# EAGLE board ENC28J60_Wing (EAGLE 6.4)
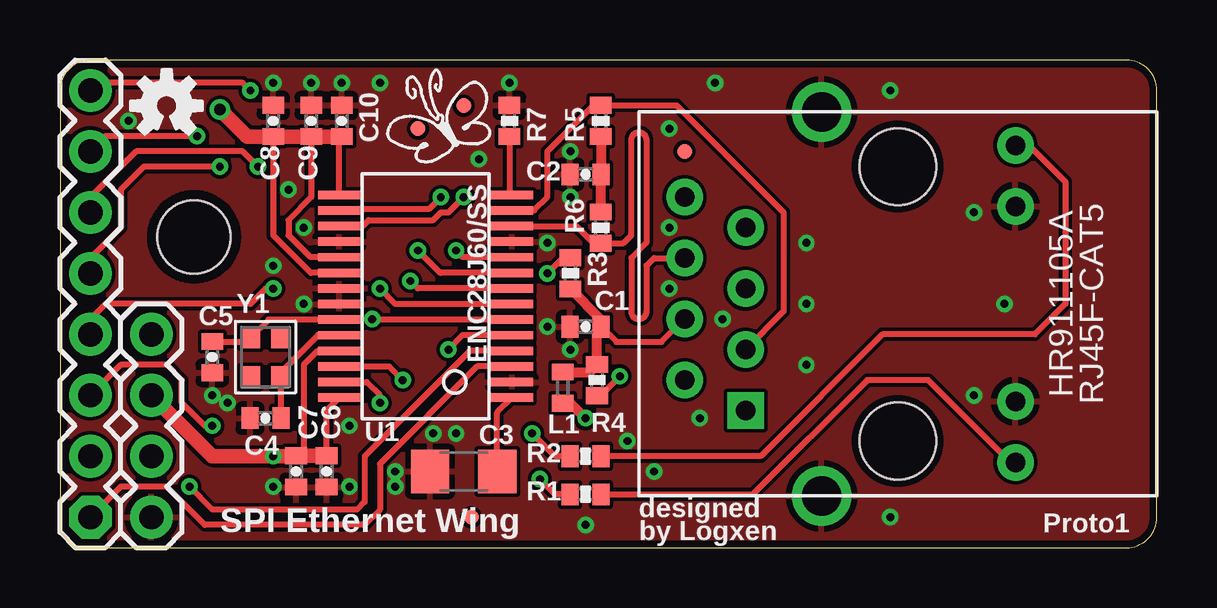
[diagram p0: board, top side]
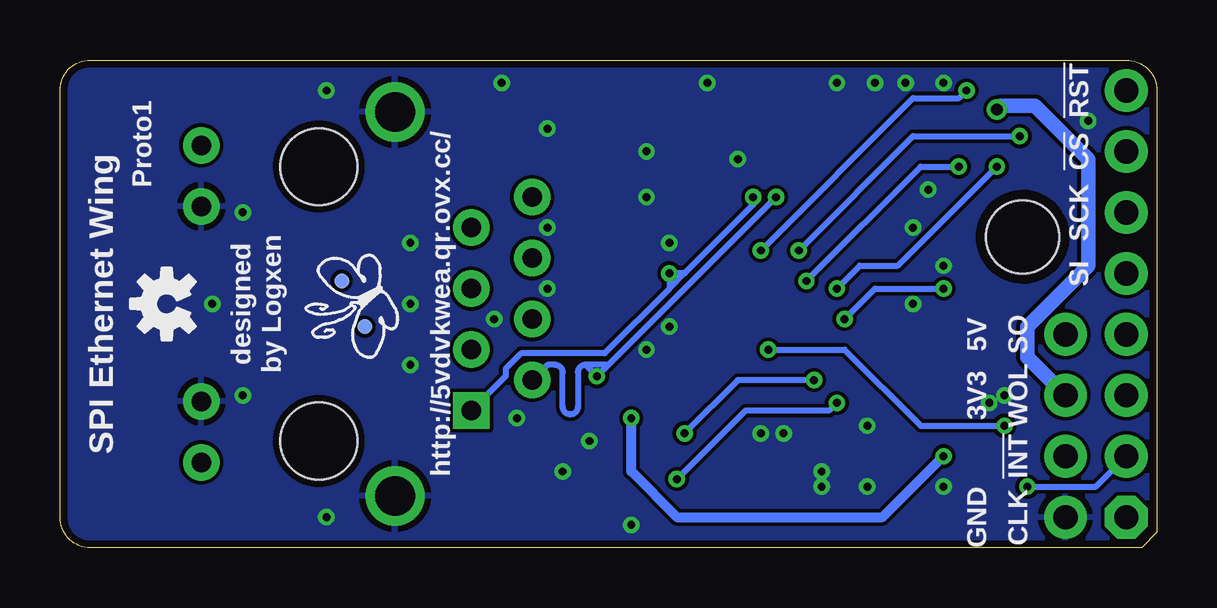
[diagram p1: board, bottom side, seen from below]

Size 45.72 x 20.32 mm. Coordinates in mm from the lower left corner, seen from the top.
Outline: 0.64,0 44.45,0 arc90 45.72,1.27 45.72,19.05 arc90 44.45,20.32 1.27,20.32 arc90 0,19.05 0,0.64 0.64,0
Copper layers (1*16): Top 0.0356mm / dielectric 1.5011mm / Bottom 0.0356mm
Design rules "LaenPCBOrder *": minimum track width 6mil, minimum drill 13mil, track to track 6mil, track to pad 6mil, pad to pad 6mil, via to via 6mil, smd to smd 6mil, copper to edge 12mil, drill to drill 6mil, minimum pad ring 7mil, minimum via ring 7mil, stop-mask expansion 4mil, vias tented up to drill 13mil, thermal gap 10mil

## Footprints (pad centres in the part's own frame; a part is rotated, then mirrored left to right if it is on the bottom)
0402-CAP = smd 0.7 x 0.9: 1 -0.65,0; 2 0.65,0
1206 = smd 1.6 x 1.8: 1 -1.4,0; 2 1.4,0
HR911105A = drill 0.813 pad 1.524 square: 1 4.445,-6.35 | drill 0.813 pad 1.524: 2 3.175,-8.89; 3 1.905,-6.35; 4 0.635,-8.89; 5 -0.635,-6.35; 6 -1.905,-8.89; 7 -3.175,-6.35; 8 -4.445,-8.89; 9 6.604,4.902; 10 4.064,4.902; 11 -4.064,4.902; 12 -6.604,4.902 | drill 1.651 pad 2.159: 13 8.001,-3.175; 14 -8.001,-3.175 | hole 3.2: 5.715,0; -5.715,0
MICRO-FIDUCIAL = smd 0.635 x 0.635: 1 0,0
PAPILIO-WING-8BITS = drill 1.016 pad 1.778 octagon: 1 0,0 | drill 1.016 pad 1.778: 2 0,2.54; 3 0,5.08; 4 0,7.62; 5 0,10.16; 6 0,12.7; 7 0,15.24; 8 0,17.78; 9 2.54,0; 10 2.54,2.54; 11 2.54,5.08; 12 2.54,7.62 | hole 3.048: 4.318,11.684
FB402 = smd 0.7 x 0.9: 1 -0.65,0; 2 0.65,0
0402-RES = smd 0.7 x 0.9: 1 -0.65,0; 2 0.65,0
TSSOP-28 = smd 0.35 x 1.75: 1 -4.225,-3.6; 2 -3.575,-3.6; 3 -2.925,-3.6; 4 -2.275,-3.6; 5 -1.625,-3.6; 6 -0.975,-3.6; 7 -0.325,-3.6; 8 0.325,-3.6; 9 0.975,-3.6; 10 1.625,-3.6; 11 2.275,-3.6; 12 2.925,-3.6; 13 3.575,-3.6; 14 4.225,-3.6; 15 4.225,3.6; 16 3.575,3.6; 17 2.925,3.6; 18 2.275,3.6; 19 1.625,3.6; 20 0.975,3.6; 21 0.325,3.6; 22 -0.325,3.6; 23 -0.975,3.6; 24 -1.625,3.6; 25 -2.275,3.6; 26 -2.925,3.6; 27 -3.575,3.6; 28 -4.225,3.6
CRYSTAL_2.5X2 = smd 0.9 x 0.8: 1 -0.825,-0.625; 2 0.825,-0.625; 3 0.825,0.625; 4 -0.825,0.625

## Placement (x,y rotation side)
C1  0.1uF  [0402-CAP]  21.91,9.21 180 top
C2  0.1uF  [0402-CAP]  21.91,15.56 180 top
C3  10uF  [1206]  16.83,3.17 180 top
C4  12pF  [0402-CAP]  8.57,5.4 180 top
C5  12pF  [0402-CAP]  6.35,7.94 270 top
C6  0.1uF  [0402-CAP]  11.11,3.17 270 top
C7  0.1uF  [0402-CAP]  9.84,3.17 270 top
C8  0.1uF  [0402-CAP]  8.89,17.78 90 top
C9  0.1uF  [0402-CAP]  10.48,17.78 90 top
C10  0.1uF  [0402-CAP]  11.75,17.78 90 top
ETH1  CON-RJ45-F  [HR911105A]  34.92,10.16 270 top
FID1  FIDUCIALUFIDUCIAL  [MICRO-FIDUCIAL]  26.04,16.51 0 top
FID2  FIDUCIALUFIDUCIAL  [MICRO-FIDUCIAL]  14.92,17.46 0 top
FID3  FIDUCIALUFIDUCIAL  [MICRO-FIDUCIAL]  17.14,1.27 0 top
FID4  FIDUCIALUFIDUCIAL  [MICRO-FIDUCIAL]  16.83,18.41 0 top
FID5  FIDUCIALUFIDUCIAL  [MICRO-FIDUCIAL]  33.97,11.11 0 bottom
FID6  FIDUCIALUFIDUCIAL  [MICRO-FIDUCIAL]  33.02,9.21 0 bottom
JP1  PAPILIO-WING-8BITS  [PAPILIO-WING-8BITS]  1.27,1.27 0 top
L1  10R  [FB402]  20.95,6.67 90 top
LOGO1  BUTTERFLY_LOGO  [BUTTERFLY_LOGO]  33.02,10.16 90 bottom
LOGO2  BUTTERFLY_LOGO  [BUTTERFLY_LOGO]  15.88,17.46 0 top
R1  330R  [0402-RES]  21.91,2.22 0 top
R2  330R  [0402-RES]  21.91,3.81 0 top
R3  49.9R  [0402-RES]  21.27,11.43 90 top
R4  49.9R  [0402-RES]  22.38,6.99 90 top
R5  49.9R  [0402-RES]  22.54,17.78 90 top
R6  49.9R  [0402-RES]  22.54,13.34 90 top
R7  2.32K  [0402-RES]  18.73,17.78 270 top
U1  IC_ENC28J60-TSSOP-28  [TSSOP-28]  15.24,10.48 90 top
U$2  OSHW-LOGOS  [OSHW-LOGO-S]  4.45,18.41 0 top
U$3  OSHW-LOGOS  [OSHW-LOGO-S]  41.27,10.16 90 bottom
Y1  25MHz  [CRYSTAL_2.5X2]  8.57,7.94 270 top

## Library data of the parts
C1-C10 = SparkFun-Capacitors
ETH1 L1 = dp_devices
FID1-FID6 U$2 U$3 = SparkFun-Aesthetics
JP1 U1 = logxen
LOGO1 LOGO2 = GadgetFactory_Pub
R1-R7 = SparkFun-Resistors
Y1 = microbuilder

## Nets
3.3V: C6.1 C7.1 C8.1 C9.1 C10.1 JP1.11 L1.1 U1.15 U1.19 U1.20 U1.25 U1.28
!CS!: JP1.7 U1.9
!INT!: JP1.2 U1.4
!RST!: JP1.8 U1.10
CLK: JP1.1 U1.3
GND: C1.2 C2.2 C3.2 C4.2 C5.2 C6.2 C7.2 C8.2 C9.2 C10.2 ETH1.10 ETH1.11 ETH1.13 ETH1.14 JP1.9 R7.1 U1.2 U1.11 U1.18 U1.21 U1.22
LEDA: R1.1 U1.27
LEDA_RES: ETH1.9 R1.2
LEDB: R2.1 U1.26
LEDB_RES: ETH1.12 R2.2
OSC1: C5.1 U1.23 Y1.1
OSC2: C4.1 U1.24 Y1.3
RBIAS: R7.2 U1.14
SCK: JP1.6 U1.8
SI: JP1.5 U1.7
SO: JP1.4 U1.6
TPIN+: ETH1.3 R5.2 U1.13
TPIN-: ETH1.6 R6.1 U1.12
TPINC: C2.1 R5.1 R6.2
TPOUT+: ETH1.1 R3.2 U1.17
TPOUT-: ETH1.2 R4.1 U1.16
TPOUTC: C1.1 ETH1.4 L1.2 R3.1 R4.2
VCAP: C3.1 U1.1
WOL: JP1.3 U1.5

## Tracks (layer width: path | path; a pad name or v marks a point on that pad's centre or on a via)
3.3V  (via drill 0.33, 0.48)
  Top 0.254: U1.25 10.74,8.2 10.16,7.62 10.16,4.14 C7.1 | U1.15 11.64,17.02 C10.1 | C9.1 10.48,14.61 9.53,13.65 9.53,13.02 10.44,12.1 U1.19 | C8.1 8.89,13.02 10.46,11.45 U1.20 | C6.1 11.11,5.72 U1.28
  Top 0.406: 11.13,3.81 C6.1 | v21.91,5.4 21.29,6.02 L1.1
  Top 0.61: 11.73,17.14 C10.1 C9.1 C8.1 7.79,17.13 v6.67,18.26 | JP1.11 6.35,3.81 v8.89,3.81 9.83,3.81 C7.1 C6.1
  Bottom 0.406: v8.89,3.81 11.43,1.27 20,1.27 21.91,3.17 v21.91,5.4
  Bottom 0.61: JP1.11 5.4,7.94 5.4,9.21 2.86,11.75 2.86,16.19 5.08,18.41 6.51,18.41 v6.67,18.26
!CS!  (via drill 0.33)
  Top 0.254: U1.9 15.85,11.45 v14.92,12.38 | v5.71,17.14 1.91,17.14 JP1.7
  Bottom 0.254: v14.92,12.38 10.16,17.14 v5.71,17.14
!INT!  (via drill 0.33)
  Top 0.254: U1.4 17.09,8.2 12.7,3.81 12.7,1.91 12.38,1.59 6.35,1.59 v5.4,2.54
  Bottom 0.254: v5.4,2.54 2.54,2.54 JP1.2
!RST!  (via drill 0.33)
  Top 0.254: U1.10 16.79,12.1 v16.51,12.38 | v7.94,19.05 7.62,19.37 1.59,19.37 JP1.8
  Bottom 0.254: v16.51,12.38 10.16,18.73 8.26,18.73 v7.94,19.05
CLK
  Top 0.254: U1.3 17.39,7.55 13.34,3.49 13.34,1.59 12.7,0.95 6.03,0.95 4.45,2.54 2.54,2.54 JP1.1
GND  (via drill 0.33)
  other vias: 11.75,19.37 21.27,14.61 8.89,2.54 9.53,14.92 6.99,6.03 12.06,2.54 10.48,19.37 6.35,6.35 38.1,13.97 39.37,10.16 38.1,6.35 34.61,1.27 34.61,19.05 31.11,12.7 31.11,10.16 31.11,7.62 25.4,17.46 25.4,13.34 17.46,16.19 16.51,4.76 8.89,19.37 21.27,8.26 13.97,3.17 18.73,19.37 21.27,16.51 20.32,9.21 15.56,4.76 27.62,9.53 13.97,2.54 8.89,11.75 2.86,17.78 10.16,13.34 27.3,19.37 13.34,19.37 20.32,12.7 10.16,10.16 25.4,10.79 26.67,5.4 12.06,5.08 23.65,4.45 24.77,3.17 21.91,0.95
  pour Top (rank 6): 0,20.32 45.72,20.32 45.72,0 0,0
  pour Bottom (rank 6): -1.27,21.59 46.99,21.59 46.99,-1.27 -1.27,-1.27
LEDA  (via drill 0.33)
  Top 0.254: U1.27 12.78,6.9 13.34,6.35 v13.34,6.03 | R1.1 20.64,2.22 v20,2.86
  Bottom 0.254: v20,2.86 17.14,5.71 13.65,5.71 v13.34,6.03
LEDA_RES
  Top 0.254: ETH1.9 39.62,3.56 36.2,6.99 33.66,6.99 28.89,2.22 R1.2
LEDB  (via drill 0.33)
  Top 0.254: U1.26 13.72,7.55 v14.29,6.99 | R2.1 20.64,3.81 v19.68,4.76
  Bottom 0.254: v19.68,4.76 17.46,6.99 v14.29,6.99
LEDB_RES
  Top 0.254: 39.62,16.76 ETH1.12 40.39,16.76 41.91,15.24 41.91,10.16 40.64,8.89 34.29,8.89 29.21,3.81 R2.2
OSC1
  Top 0.254: C5.1 7.77,8.59 Y1.1 8.69,9.5 U1.23
OSC2
  Top 0.254: C4.1 9.22,7.09 Y1.3 9.2,7.29 10.76,8.85 U1.24
RBIAS
  Top 0.254: R7.2 18.73,14.81 U1.14
SCK  (via drill 0.33)
  Top 0.254: U1.8 14.91,10.8 v14.61,11.11 | v8.26,15.88 7.62,16.51 3.17,16.51 1.27,14.61 JP1.6
  Bottom 0.254: v14.61,11.11 9.84,15.88 v8.26,15.88
SI  (via drill 0.33)
  Top 0.254: U1.7 13.98,10.15 v13.34,10.79 | v6.67,15.88 3.49,15.88 2.54,14.92 2.54,13.34 1.27,12.06 JP1.5
  Bottom 0.254: v13.34,10.79 12.38,11.75 10.79,11.75 v6.67,15.88
SO  (via drill 0.33)
  Top 0.254: U1.6 13.04,9.5 v13.02,9.53 | v8.89,10.79 8.57,10.79 7.94,10.16 1.91,10.16 1.27,9.53 JP1.4
  Bottom 0.254: v13.02,9.53 11.75,10.79 v8.89,10.79
TPIN+
  Top 0.254: ETH1.3 30.16,9.84 30.16,13.97 25.7,18.43 R5.2 22.24,18.43 20.32,16.51 20.32,14.61 19.77,14.05 U1.13
TPIN-
  Top 0.254: U1.12 21.52,13.4 22.24,12.69 R6.1 23.48,12.69 23.81,13.02 23.81,16.99 arc-90 24.13,17.3 arc-90 24.45,16.99 24.45,12.7 23.81,12.06 23.81,9.84 arc90 24.13,9.53 arc90 24.45,9.84 24.45,11.75 24.77,12.06 ETH1.6
TPINC
  Top 0.406: R5.1 22.54,15.57 | 22.54,15.57 C2.1 22.54,15.54 | R6.2 22.54,15.57
TPOUT+  (via drill 0.33)
  Top 0.254: R3.2 20.97,12.08 v20.32,11.43 | v16.83,14.61 16.19,13.97 15.88,13.97 15.56,13.65 12.86,13.65 12.61,13.4 U1.17
  Bottom 0.254: v16.83,14.61 16.83,14.29 19.68,11.43 | 19.68,11.43 v20.32,11.43 20.32,10.79 | 20.32,10.79 23.02,8.1 26.51,8.1 27.15,7.46 27.15,7.14 ETH1.1 | 19.68,11.43 20.32,10.79
TPOUT-  (via drill 0.33)
  Top 0.254: R4.1 22.53,6.33 v23.34,7.14 | U1.16 12.46,14.05 12.54,14.13 15.4,14.13 v15.88,14.61
  Bottom 0.254: v15.88,14.61 22.86,7.62 | 22.86,7.62 23.81,7.62 | 23.81,7.62 v23.34,7.14 22.86,7.62 | 23.81,7.62 arc-90 24.13,7.3 24.13,5.87 arc90 24.45,5.56 arc90 24.77,5.87 24.77,7.3 arc-90 25.08,7.62 25.4,7.62 ETH1.2
TPOUTC
  Top 0.254: C1.1 23.19,8.57 25.08,8.57 ETH1.4
  Top 0.406: 22.54,9.22 C1.1 | C1.1 22.56,9.49 R3.1 | C1.1 22.38,9.03 R4.2 22.07,7.32 L1.2
VCAP
  Top 0.254: C3.1 18.23,5.64 U1.1
WOL  (via drill 0.33)
  Top 0.254: U1.5 16.79,8.85 v16.19,8.26 | JP1.3 2.54,7.62 4.45,7.62 5.08,6.99 5.08,6.03 6.03,5.08 v6.35,5.08
  Bottom 0.254: v16.19,8.26 13.02,8.26 9.84,5.08 v6.35,5.08

## Text on the board
tPlace: ENC28J60/SS | HR911105A | RJ45F-CAT5 | SPI Ethernet Wing | designed | Proto1 | by Logxen
bPlace: !RST! | !CS! | Proto1 | SCK | SI | http://5vdvkwea.qr.ovx.cc/ | by Logxen | designed | SPI Ethernet Wing | SO | 5V | WOL | 3V3 | !INT! | CLK | GND